# Altium PCB PCB2.PcbDoc
Units mm, origin at the board's own origin, x right, y up, seen from the top; angles counter-clockwise.
Board outline 100 x 100 mm, 4 copper layers (Top Layer, Internal Plane 1, Internal Plane 2, Bottom Layer), stack 0.462 mm thick; 3 components, 52 nets, 53 pads, 0 vias.
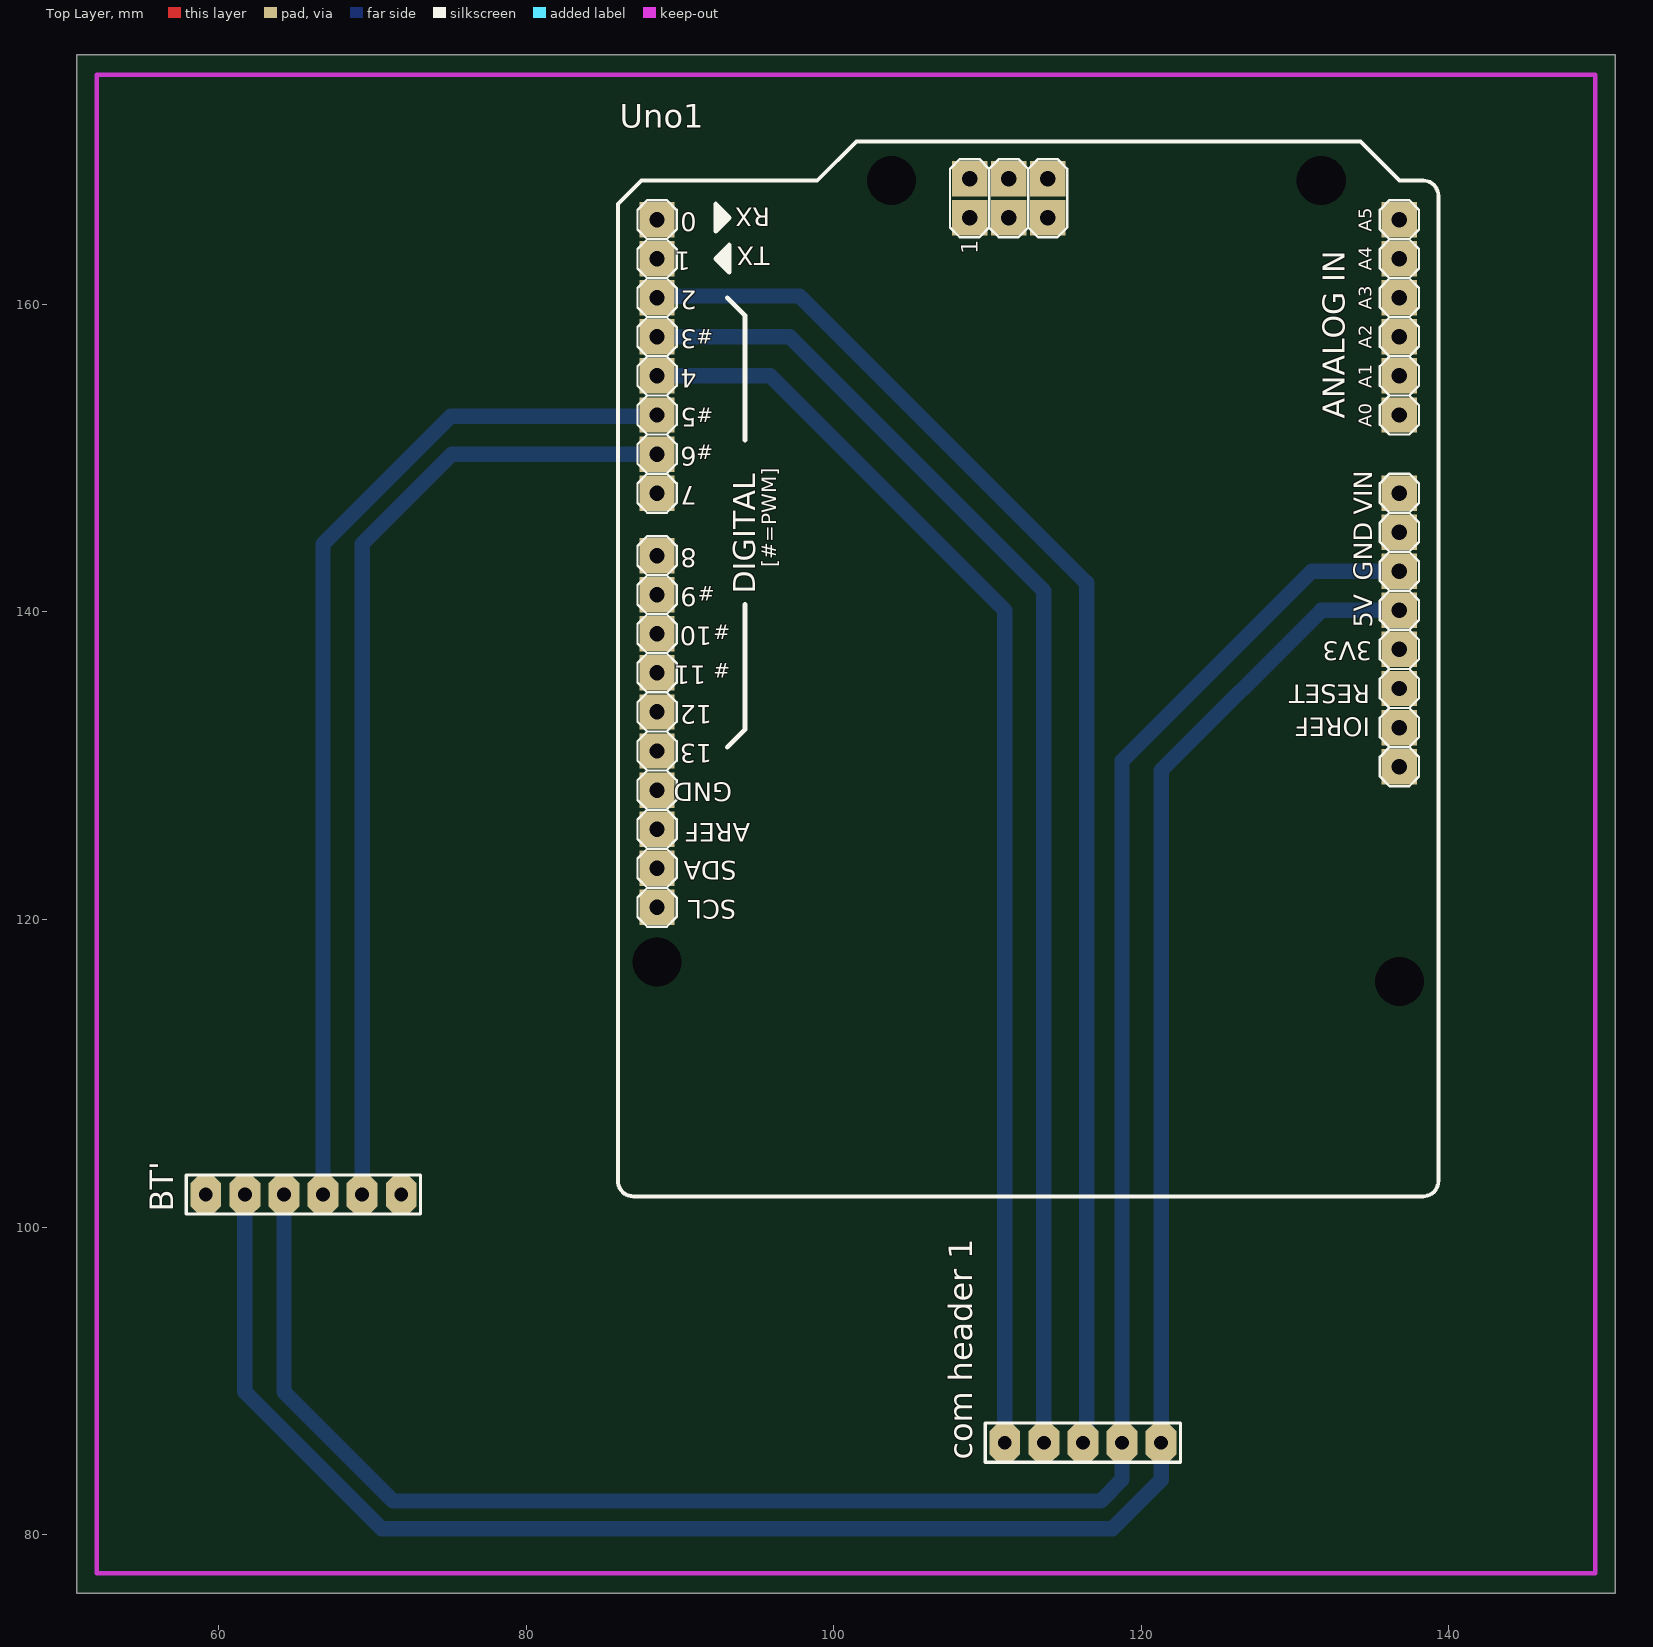
[diagram p0: Top Layer view]
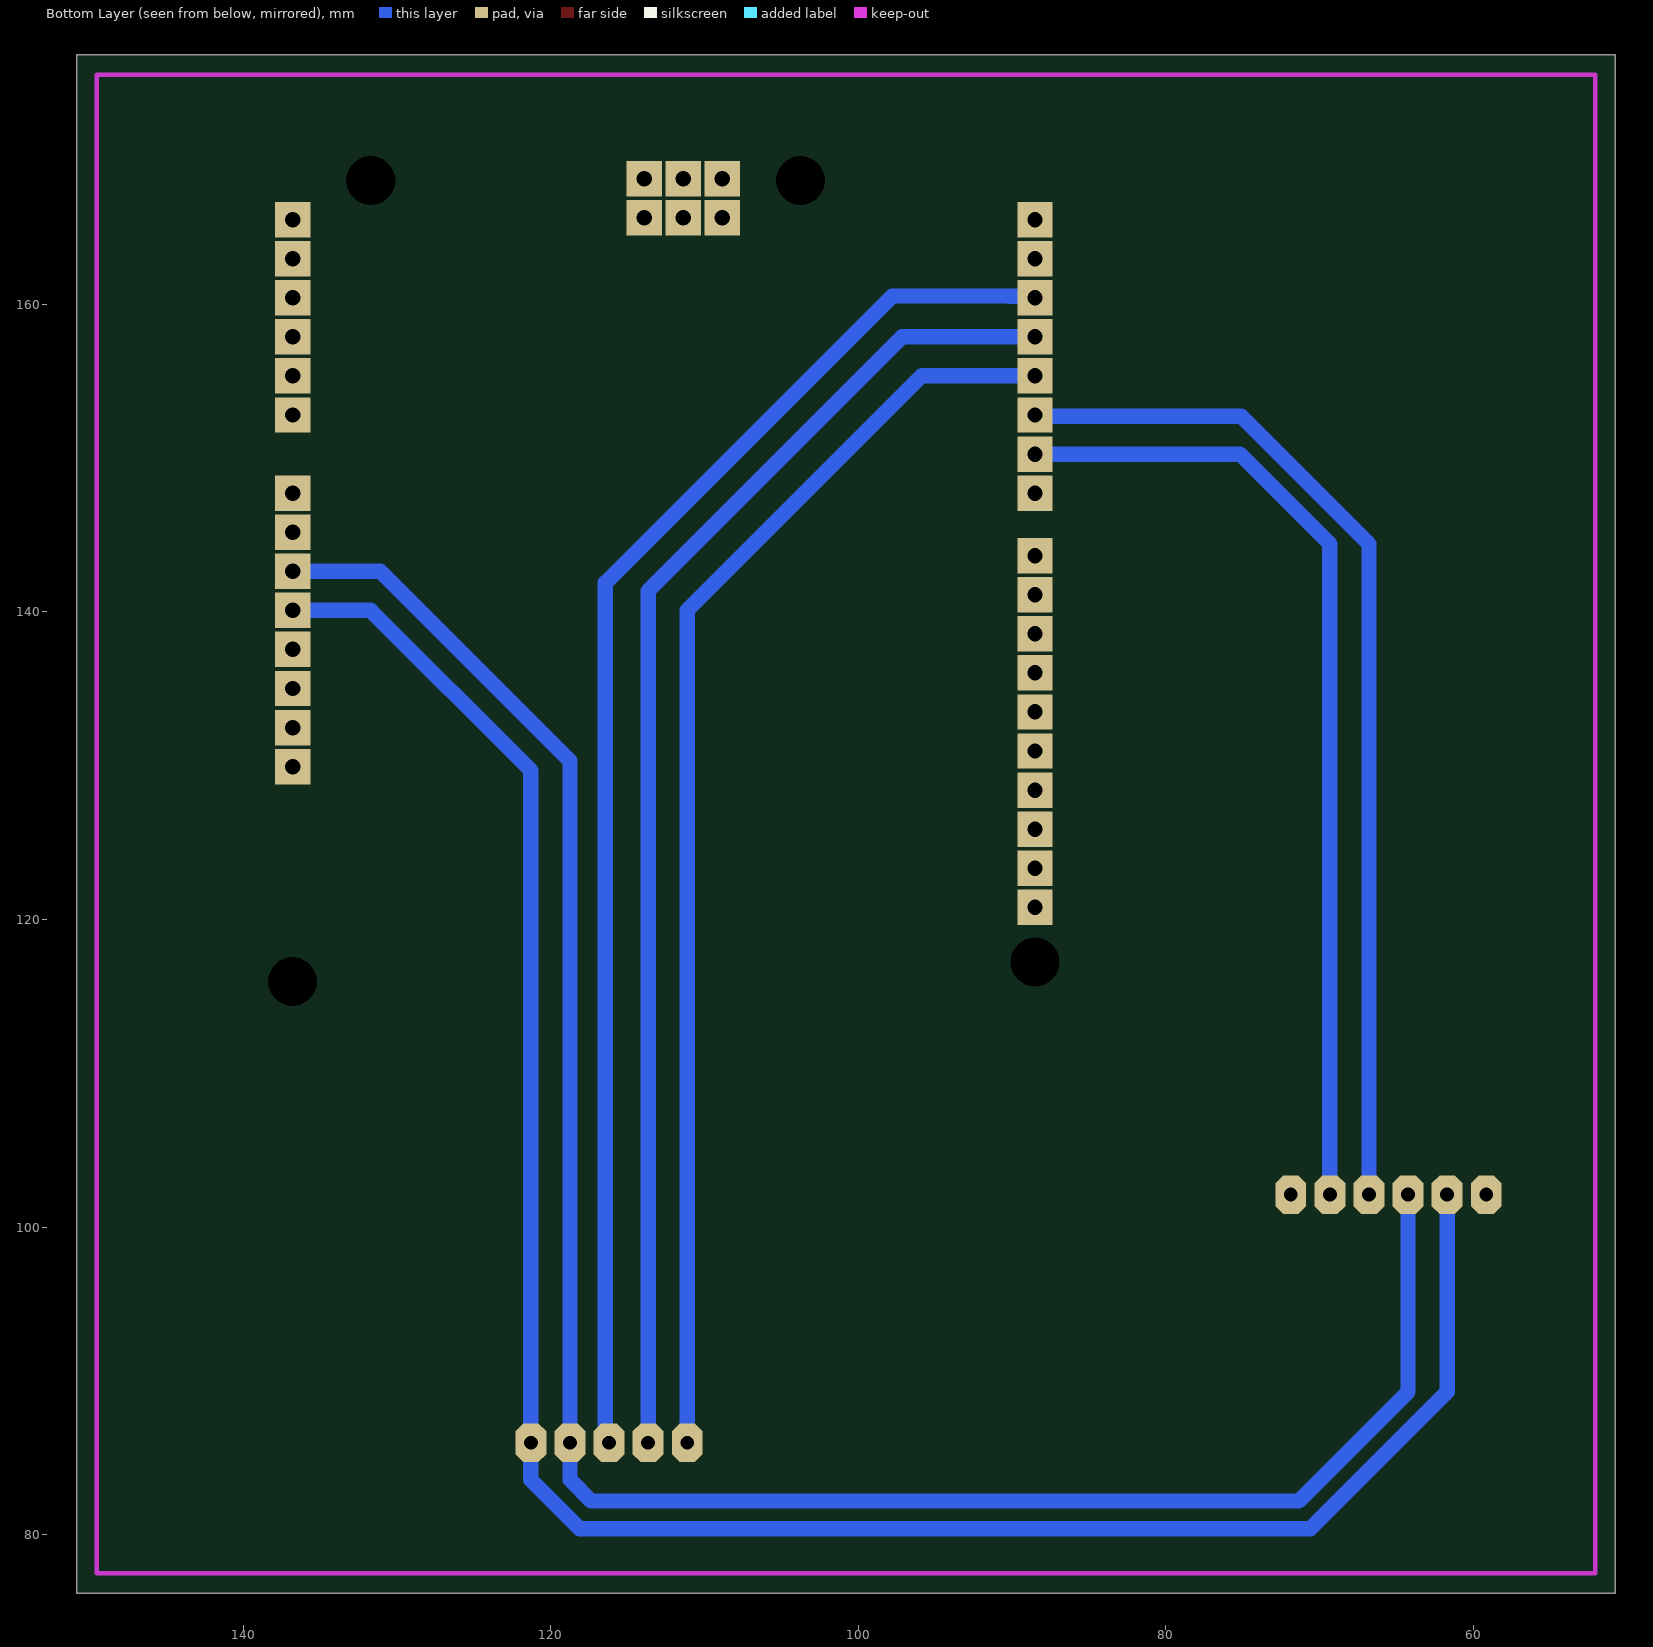
[diagram p1: Bottom Layer view, seen from below]
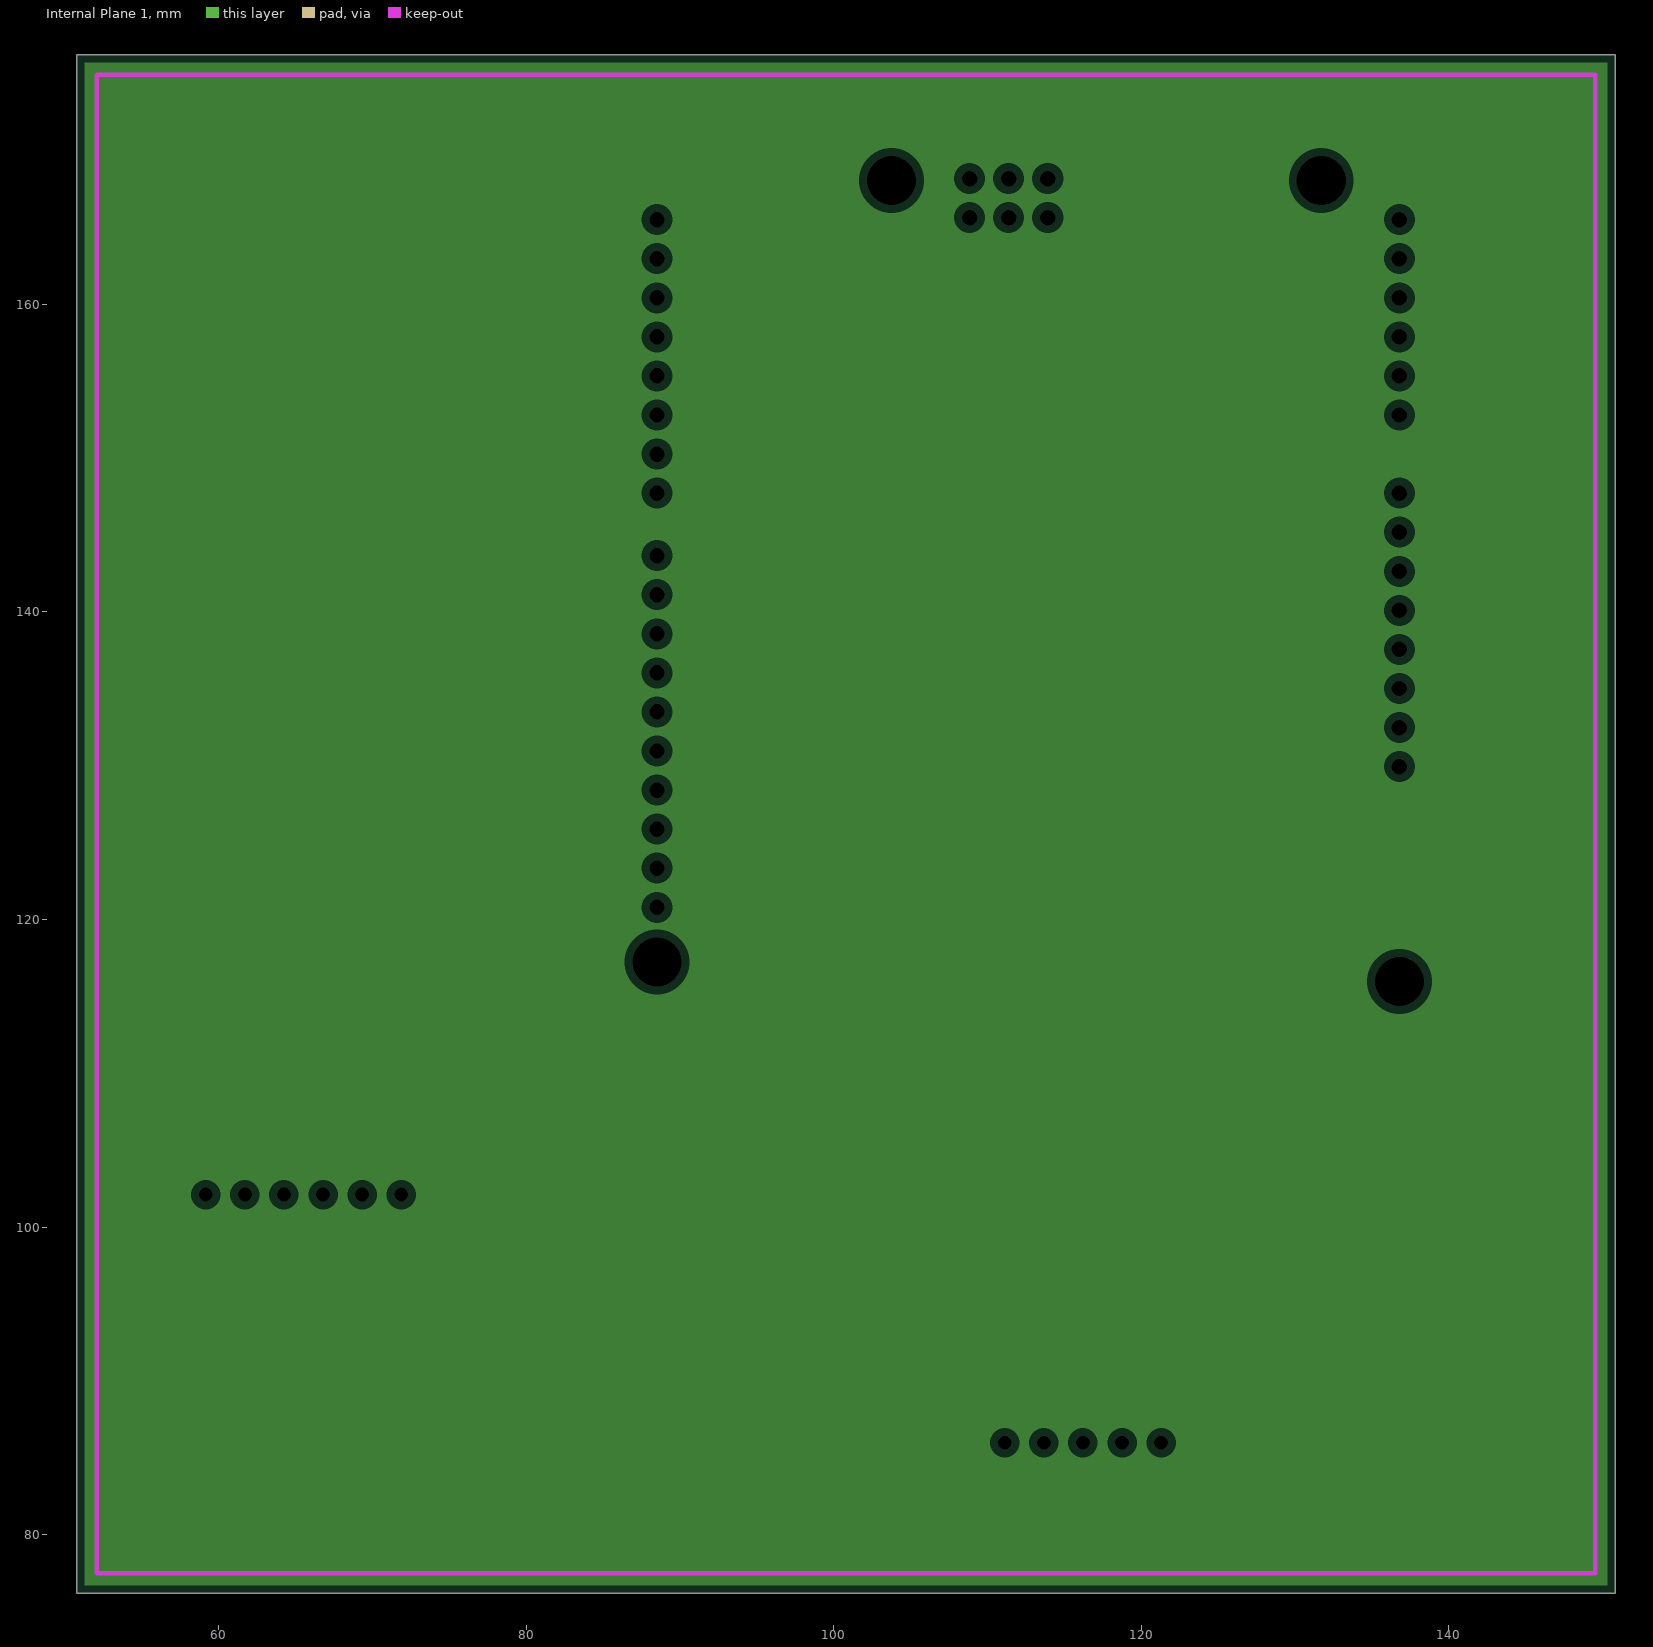
[diagram p2: Internal Plane 1, clearances drawn from the general rule]
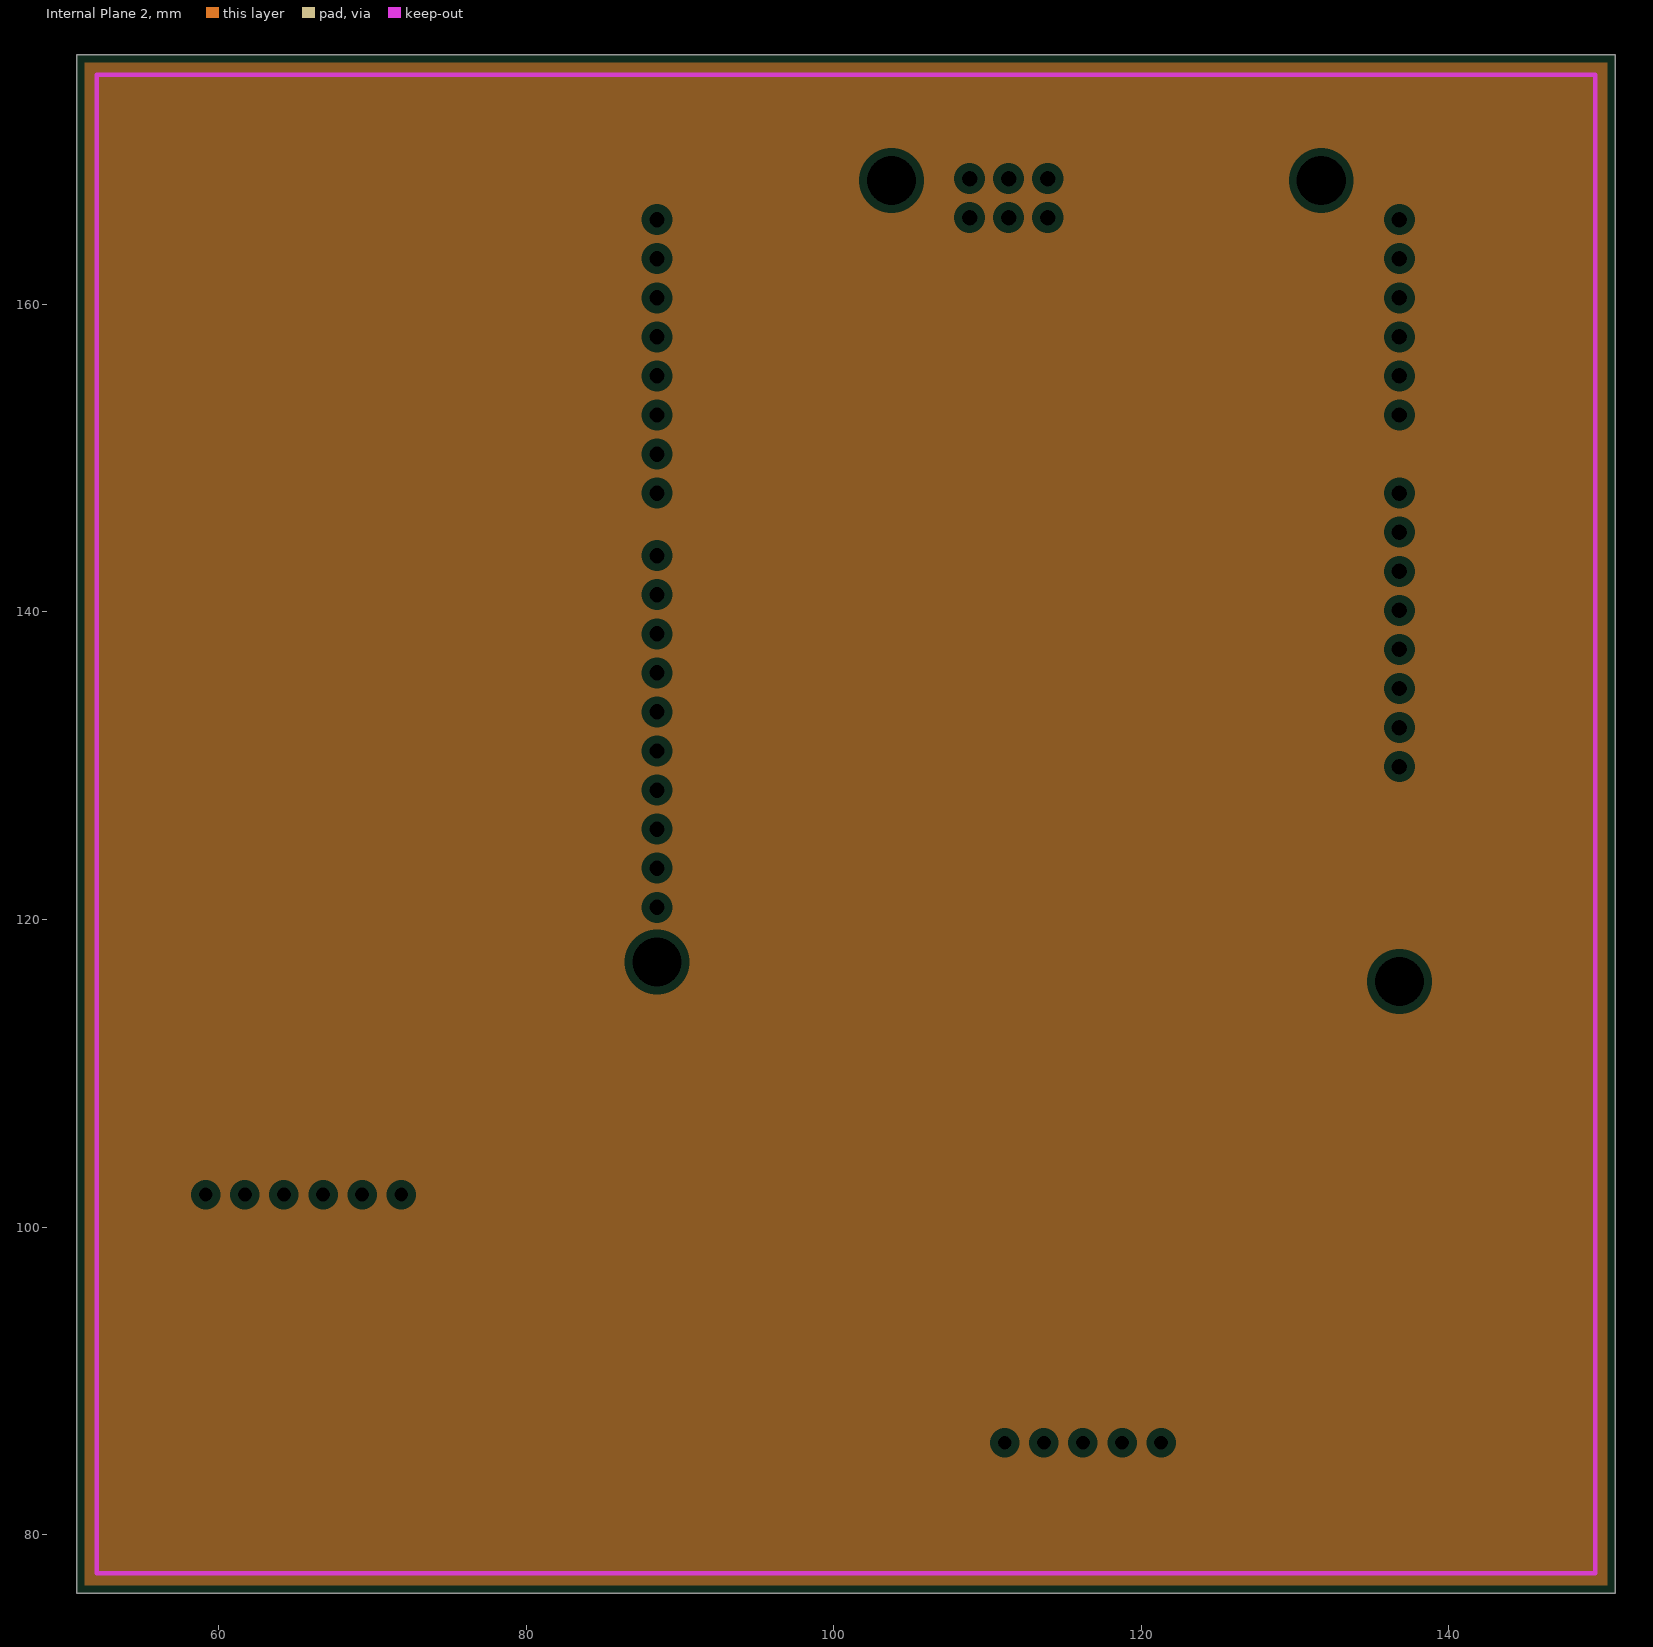
[diagram p3: Internal Plane 2, clearances drawn from the general rule]

## Layer stack, top to bottom
Top Solder: solder mask 0.0102, Solder Resist, Dk 3.5
Top Layer: signal copper 0.0356
Internal Plane 1: plane copper 0.0356
Internal Plane 2: plane copper 0.0356
Dielectric 1: dielectric 0.32, FR-4, Dk 4.8
Bottom Layer: signal copper 0.0356
Bottom Solder: solder mask 0.0102, Solder Resist, Dk 3.5

## Board outline
50.8,76.2 150.8,76.2 150.8,176.2 50.8,176.2

## Design rules (kind name [scope] priority, off if disabled: settings)
Clearance [All] p1: gap=0.8
PlaneClearance [All] p1: clearance=0.508
PlaneConnect [All] p1: planeconnectstyle=Relief reliefexpansion=0.508 reliefentries=4 reliefconductorwidth=0.254 reliefairgap=0.254
PolygonConnect [All] p1: connectstyle=Relief reliefconductorwidth=0.254 reliefentries=4 polygonreliefangle="90 Angle" airgapwidth=0.254
RoutingVias [All] p1: holewidth=1 width=2 viastyle="Through Hole" minholewidth=0.711 minwidth=1.27 maxholewidth=0.711 maxwidth=1.27
SolderMaskExpansion [All] p1: expansion=0.102
Width [All] p1: maxlimit=1 minlimit=1 preferedwidth=1
28 further rules are at their usual default settings.

## Components (designator, comment, footprint, x,y, rotation, side; value= is the part's Value field where it differs from the comment)
BT' "Header 6" HDR1X6 71.882,102.108 r180 top
"com header 1" "Header 5" HDR1X5 121.285,85.979 r180 top
Uno1 "Arduino Uno" "Arduino Uno" 112.776,138.049 r90 top

## Footprints (in the part's own frame and the unit in brackets; to place one, negate y for a bottom-side part, rotate by r counter-clockwise, add the part's x,y. Pads: shape width x height; smd on the part's side, far side on the other; paste and mask are expansions set on the pad)
"Arduino Uno" [mm]
  rect 2.3x2.3 hole 1: 0(27.44,24.26) 1(24.9,24.26) 2(22.36,24.26) 3(19.82,24.26) 3V3(-0.5,-24) 4(17.28,24.26) 5(14.74,24.26) 5V(2.04,-24) 6(12.2,24.26) 7(9.66,24.26) 8(5.596,24.26) 9(3.056,24.26) 10(0.516,24.26) 11(-2.024,24.26) 12(-4.564,24.26) 13(-7.104,24.26) A0(14.74,-24) A1(17.28,-24) A2(19.82,-24) A3(22.36,-24) A4(24.9,-24) A5(27.44,-24) AREF(-12.184,24.26) GND1(4.58,-24) GND2(7.12,-24) GND3(-9.644,24.26) ICSP1(27.567,3.94) ICSP2(30.107,3.94) ICSP3(27.567,1.4) ICSP4(30.107,1.4) ICSP5(27.567,-1.14) ICSP6(30.107,-1.14) IOREF(-5.58,-24) NC(-8.12,-24) RESET(-3.04,-24) SCL(-17.264,24.26) SDA(-14.724,24.26) Vin(9.66,-24)
  oct 2x2.5 hole 3.2: H1(-20.82,24.26) H2(-22.09,-24) H3(29.98,-18.92) H4(29.98,9.02)
  Bottom Layer lines w0.305: -14.724,24.26 -14.47,24.26
  silkscreen extent -36.06,-26.54 32.52,26.8
HDR1X5 [mm] "Connector; Header; 5 Position"
  oct 2x2.5 hole 0.9: 1(0,0) 2(2.54,0) 3(5.08,0) 4(7.62,0) 5(10.16,0)
  silkscreen extent -1.27,-1.27 11.43,1.27
HDR1X6 [mm] "Connector; Header; 6 Position"
  oct 2x2.5 hole 0.9: 1(0,0) 2(2.54,0) 3(5.08,0) 4(7.62,0) 5(10.16,0) 6(12.7,0)
  silkscreen extent -1.27,-1.27 13.97,1.27

## Part data
BT': "Header, 6-Pin"
"com header 1": "Header, 5-Pin"

## Nets (pads, with @x,y where several pads share a name; then routed paths per layer and width w, separated by ;. In a path a pad name is that pad's centre, name@x,y a point inside that pad or via, vN(x,y) a via of type N, cw(c..) or ccw(c..) an arc to the next point about the centre after c; other vN are vias at no path point)
CLK: "com header 1.5" Uno1.4 | length 83
  Bottom Layer w1: Uno1.4 95.877,155.329 111.125,140.081 111.125,85.979
CS: "com header 1.4" Uno1.3 | length 87.4
  Bottom Layer w1: Uno1.3 97.147,157.869 113.665,141.351 113.665,85.979
DIN: "com header 1.3" Uno1.2 | length 91.7
  Bottom Layer w1: Uno1.2 88.606,160.499 90.204,160.499 90.233,160.528 97.79,160.528 116.445,141.873 116.445,86.219 116.205,85.979
GND: "com header 1.2" BT'.4 Uno1.GND1 | length 140.8
  Bottom Layer w1: BT'.4 64.262,89.287 71.358,82.191 117.364,82.191 118.745,83.572 118.745,85.979 118.745,130.308 131.066,142.629 Uno1.GND1 Uno1.GND1@136.686,142.539
Net1B_1: 
Net1B_2: 
Net1B_3: 
Net1B_4: 
Net1B_5: 
Net2B_1: 
Net2B_2: 
Net2B_3: 
Net2B_4: 
Net2B_5: 
Net3B_1: 
Net3B_2: 
Net3B_3: 
Net3B_4: 
Net3B_5: 
Net4B_1: 
Net4B_2: 
Net4B_3: 
Net4B_4: 
Net4B_5: 
Net5B_1: 
Net5B_2: 
Net5B_3: 
Net5B_4: 
Net5B_5: 
Net6B_1: 
Net6B_2: 
Net6B_3: 
Net6B_4: 
Net6B_5: 
Net7B_1: 
Net7B_2: 
Net7B_3: 
Net7B_4: 
Net7B_5: 
Net8B_1: 
Net8B_2: 
Net8B_3: 
Net8B_4: 
Net8B_5: 
Net9B_1: 
Net9B_2: 
Net9B_3: 
Net9B_4: 
Net9B_5: 
NetBT'_2: BT'.2 Uno1.6 | length 63.9
  Bottom Layer w1: BT'.2 69.342,144.399 75.192,150.249 Uno1.6
NetBT'_3: BT'.3 Uno1.5 | length 67.5
  Bottom Layer w1: BT'.3 66.802,144.405 75.096,152.699 88.426,152.699 Uno1.5
VCC: "com header 1.1" BT'.5 Uno1.5V | length 143.3
  Bottom Layer w1: BT'.5 61.722,89.281 70.612,80.391 118.11,80.391 121.285,83.566 121.285,85.979 121.285,129.675 131.699,140.089 Uno1.5V
pads on no net: BT'.1 BT'.6 Uno1.0 Uno1.1 Uno1.3V3 Uno1.7 Uno1.8 Uno1.9 Uno1.10 Uno1.11 Uno1.12 Uno1.13 Uno1.A0 Uno1.A1 Uno1.A2 Uno1.A3 Uno1.A4 Uno1.A5 Uno1.AREF Uno1.GND2 Uno1.GND3 Uno1.H1 Uno1.H2 Uno1.H3 Uno1.H4 Uno1.ICSP1 Uno1.ICSP2 Uno1.ICSP3 Uno1.ICSP4 Uno1.ICSP5 Uno1.ICSP6 Uno1.IOREF Uno1.NC Uno1.RESET Uno1.SCL Uno1.SDA Uno1.Vin

## Keep-outs
Keep-Out Layer:
  lines w0.3: 52.1,77.5 149.5,77.5 149.5,174.9 52.1,174.9 52.1,77.5

## Dimensions
52.1,77.5 to 149.5,77.5 on Mechanical 1
52.1,77.5 to 52.1,174.9 on Mechanical 1

## Text inside footprints (layer, text, board x,y; h text height)
Uno1: Top Overlay "5V" at 134.998,138.946 h1.21 r90; Top Overlay "A0" at 134.973,152.002 h0.86 r90; Top Overlay "ANALOG IN" at 133.22,152.535 h1.42 r90; Top Overlay "AREF" at 94.573,126.235 h1.21 r180; Top Overlay "1" at 109.369,163.254 h1.08 r90; Top Overlay "GND" at 93.39,128.877 h1.21 r180; Top Overlay "RESET" at 134.871,135.263 h1.21 r180; Top Overlay "3V3" at 134.998,138.057 h1.21 r180; Top Overlay "A1" at 134.973,154.542 h0.86 r90; Top Overlay "A2" at 134.973,157.082 h0.86 r90; Top Overlay "A3" at 134.973,159.622 h0.86 r90; Top Overlay "A4" at 134.973,162.162 h0.86 r90; Top Overlay "A5" at 134.973,164.702 h0.86 r90; Top Overlay "VIN" at 134.998,146.312 h1.21 r90; Top Overlay "GND" at 134.998,142.019 h1.21 r90; Top Overlay "IOREF" at 134.871,133.104 h1.21 r180; Top Overlay "DIGITAL" at 94.891,141.156 h1.42 r90; Top Overlay "TX" at 95.857,163.711 h1.21 r180; Top Overlay "RX" at 95.882,166.251 h1.21 r180; Top Overlay "13" at 92.107,131.392 h1.21 r180; Top Overlay "12" at 92.107,133.932 h1.21 r180; Top Overlay "11" at 91.704,136.472 h1.21 r180; Top Overlay "10" at 92.107,139.012 h1.21 r180; Top Overlay "9" at 91.1,141.552 h1.21 r180; Top Overlay "8" at 91.1,144.092 h1.21 r180; Top Overlay "7" at 91.1,148.156 h1.21 r180; Top Overlay "6" at 91.1,150.696 h1.21 r180; Top Overlay "5" at 91.1,153.236 h1.21 r180; Top Overlay "4" at 91.1,155.776 h1.21 r180; Top Overlay "3" at 91.1,158.316 h1.21 r180; Top Overlay "2" at 91.1,160.856 h1.21 r180; Top Overlay "1" at 90.697,163.396 h1.21 r180; Top Overlay "0" at 91.1,165.936 h1.21 r180; Top Overlay "[#=PWM]" at 96.263,142.883 h0.95 r90; Top Overlay "#" at 93.276,136.649 h0.95 r180; Top Overlay "#" at 93.276,139.149 h0.95 r180; Top Overlay "#" at 92.176,153.249 h0.95 r180; Top Overlay "#" at 92.176,158.349 h0.95 r180; Top Overlay "#" at 92.176,150.849 h0.95 r180; Top Overlay "#" at 92.276,141.649 h0.95 r180; Top Overlay "SCL" at 93.676,121.249 h1.21 r180; Top Overlay "SDA" at 93.689,123.778 h1.21 r180